# EAGLE board wii (EAGLE 9.4.2)
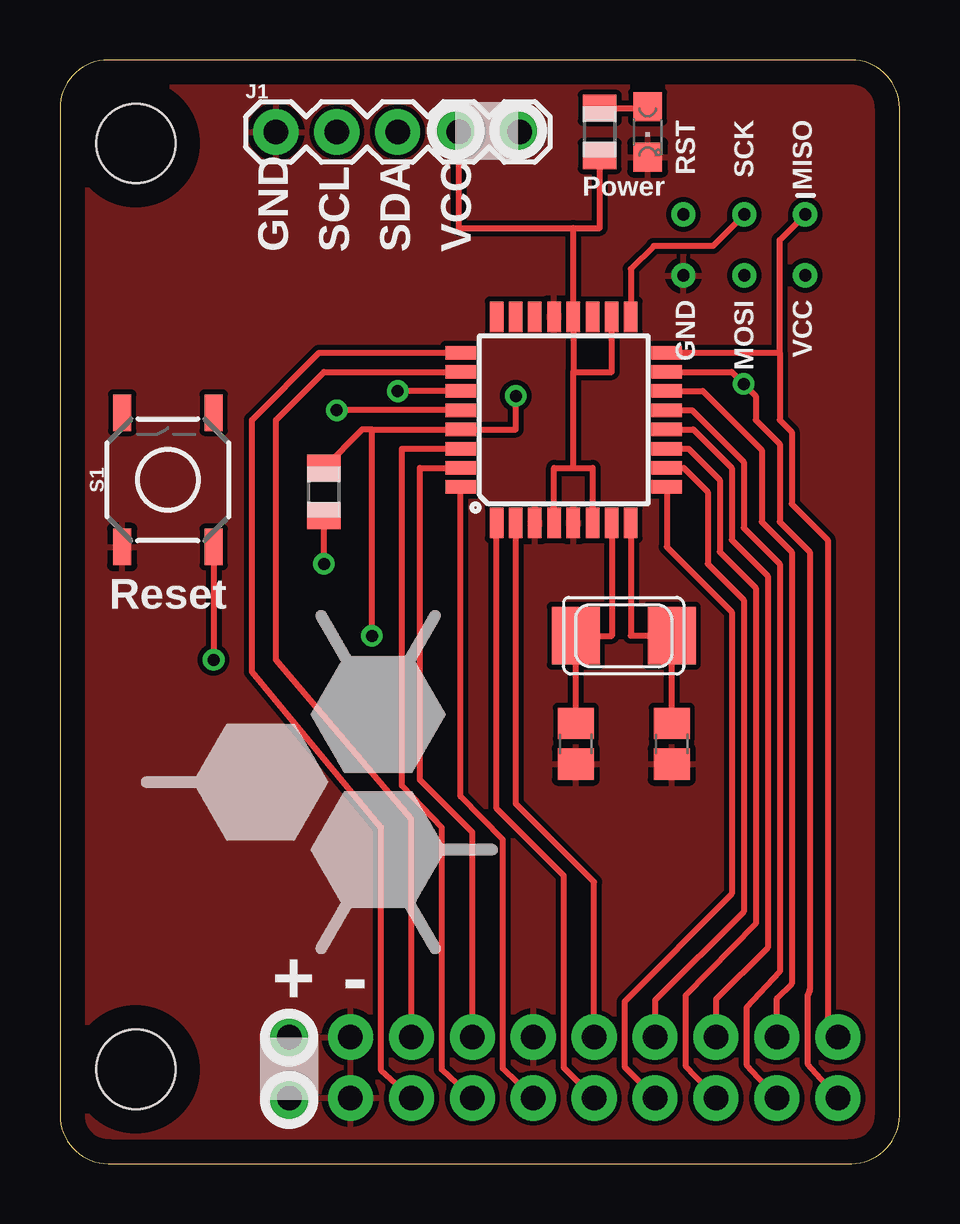
[diagram p0: board, top side]
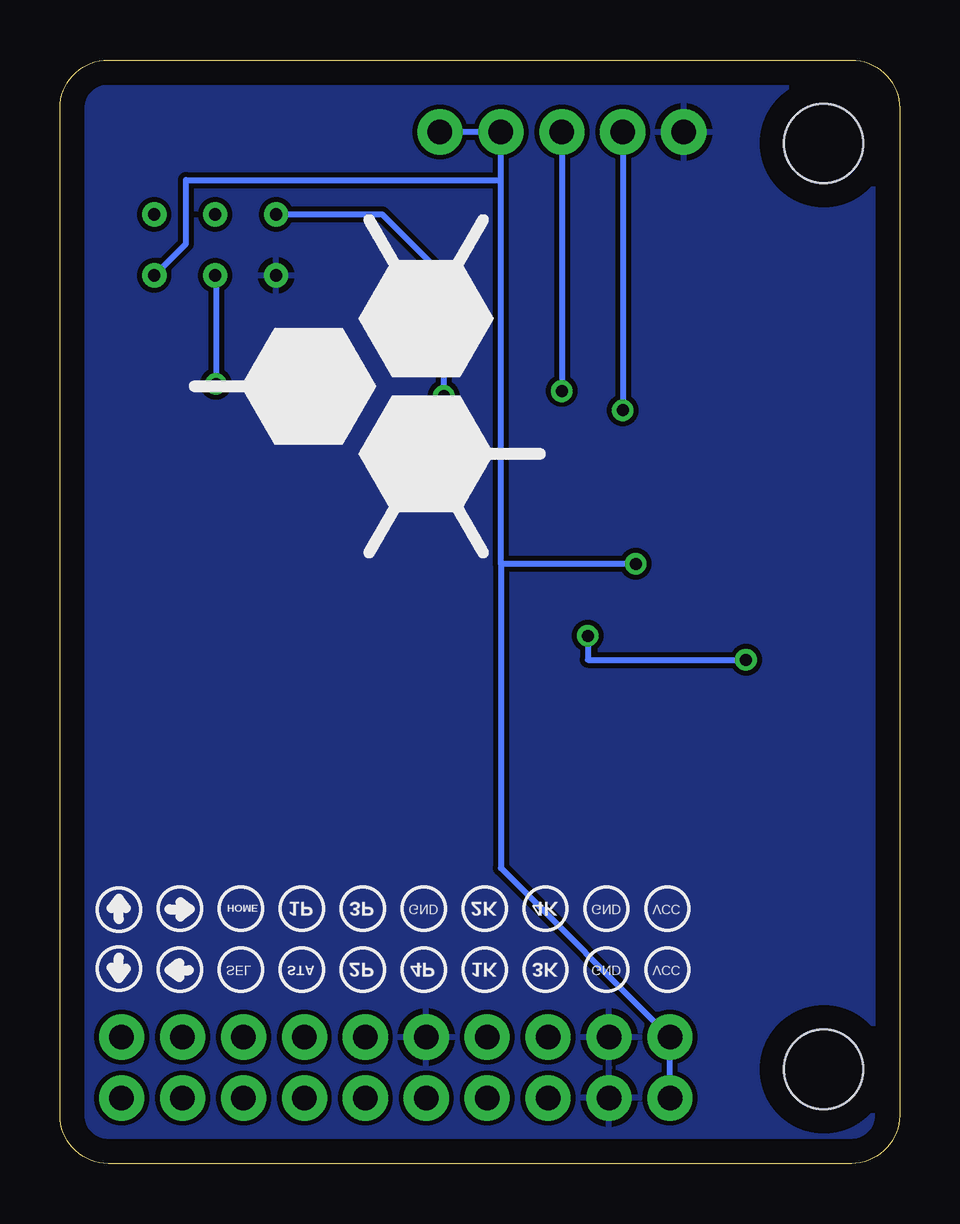
[diagram p1: board, bottom side, seen from below]

Size 35 x 46 mm. Coordinates in mm from the lower left corner, seen from the top.
Outline: 0,44 0,2 arc90 2,0 33,0 arc90 35,2 35,44 arc90 33,46 2,46 arc90 0,44
Copper layers (1*16): Top 0.035mm / dielectric 1.5mm / Bottom 0.035mm
Design rules "default": minimum track width 10mil, minimum drill 24mil, track to track 8mil, track to pad 8mil, pad to pad 8mil, via to via 8mil, smd to smd 8mil, copper to edge 40mil, drill to drill 8mil, minimum pad ring 10mil, minimum via ring 8mil, stop-mask expansion 4mil, vias tented up to drill 0mil, thermal gap 10mil

## Footprints (pad centres in the part's own frame; a part is rotated, then mirrored left to right if it is on the bottom)
C0805 = smd 1.3 x 1.5: 1 -0.85,0; 2 0.85,0
2X3_TEST_POINTS = drill 0.508: 1 -2.54,-1.27; 2 -2.54,1.27; 3 0,-1.27; 4 0,1.27; 5 2.54,-1.27; 6 2.54,1.27
1X05 = drill 1.016 pad 1.88: 1 0,0; 2 2.54,0; 3 5.08,0; 4 7.62,0; 5 10.16,0
CHIPLED_0805 = smd 1.2 x 1.2: A 0,-1.05; C 0,1.05
R0805 = smd 1.1 x 1.4: 1 -1,0; 2 1,0
TACTILE_SWITCH_SMD_5.2MM = smd 1.524 x 0.762: 1 -2.794,1.905; 2 2.794,1.905; 3 -2.794,-1.905; 4 2.794,-1.905
TQFP32-08 = smd 1.27 x 0.559: 1 -4.293,2.8; 2 -4.293,2; 3 -4.293,1.2; 4 -4.293,0.4; 5 -4.293,-0.4; 6 -4.293,-1.2; 7 -4.293,-2; 8 -4.293,-2.8; 17 4.293,-2.8; 18 4.293,-2; 19 4.293,-1.2; 20 4.293,-0.4; 21 4.293,0.4; 22 4.293,1.2; 23 4.293,2; 24 4.293,2.8 | smd 0.559 x 1.27: 9 -2.8,-4.293; 10 -2,-4.293; 11 -1.2,-4.293; 12 -0.4,-4.293; 13 0.4,-4.293; 14 1.2,-4.293; 15 2,-4.293; 16 2.8,-4.293; 25 2.8,4.293; 26 2,4.293; 27 1.2,4.293; 28 0.4,4.293; 29 -0.4,4.293; 30 -1.2,4.293; 31 -2,4.293; 32 -2.8,4.293
2X10_ROUND_NOSILK = drill 1.016 pad 1.88: 1 -11.43,-1.27; 2 -11.43,1.27; 3 -8.89,-1.27; 4 -8.89,1.27; 5 -6.35,-1.27; 6 -6.35,1.27; 7 -3.81,-1.27; 8 -3.81,1.27; 9 -1.27,-1.27; 10 -1.27,1.27; 11 1.27,-1.27; 12 1.27,1.27; 13 3.81,-1.27; 14 3.81,1.27; 15 6.35,-1.27; 16 6.35,1.27; 17 8.89,-1.27; 18 8.89,1.27; 19 11.43,-1.27; 20 11.43,1.27
STAND-OFF = hole 3.302: 0,0
NX5032 = smd 2 x 2.4: P$1 2,0; P$2 -2,0

## Placement (x,y rotation side)
C2  18pF  [C0805]  21.5,17.5 270 top
C3  18pF  [C0805]  25.5,17.5 270 top
ISP6  AVR_SPI_PRG_6TESTPOINTS  [2X3_TEST_POINTS]  28.53,38.29 180 top
J1  [1X05]  9,43 0 top
LEDPWR  LED  [CHIPLED_0805]  24.5,43 180 top
R2  1K  [R0805]  22.5,43 270 top
R7  10k  [R0805]  11,28 90 top
S1  MOMENTARY-SWITCH-SPST-SMD-5.2MM  [TACTILE_SWITCH_SMD_5.2MM]  4.5,28.5 90 top
U2  ATMEGA328P_TQFP  [TQFP32-08]  21,31 90 top
U$1  20 pin breakout  [2X10_ROUND_NOSILK]  21,4 0 bottom
U$2  [STAND-OFF]  3.16,42.52 0 top
U$3  [STAND-OFF]  3.16,3.92 0 top
X3  16MHz  [NX5032]  23.5,22 0 top

## Library data of the parts
C2 C3 LEDPWR R2 R7 = adafruit
ISP6 J1 U$1 = SparkFun-Connectors
S1 = SparkFun-Switches; PROD_ID: SWCH-08247; SF_SKU: COM-08720
U2 = SparkFun-IC-Microcontroller; PROD_ID: IC-09069
U$2 U$3 = SparkFun-Hardware
X3 = adaprog

## Nets
A0: U2.23
A1: U2.24
A2/4K: U2.25 U$1.15
A3/3K: U2.26 U$1.16
A4/SDA: J1.3 U2.27
A5/SCL: J1.2 U2.28
D0/2K: U2.30 U$1.13
D1/1K: U2.31 U$1.14
D2/4P: U2.32 U$1.11
D3/3P: U2.1 U$1.9
D4/2P: U2.2 U$1.10
D5/1P: U2.9 U$1.7
D6/START: U2.10 U$1.8
D7/HOME: U2.11 U$1.5
D8/SELECT: U2.12 U$1.6
D9/LEFT: U2.13 U$1.3
D10/RIGHT: U2.14 U$1.4
GND: C2.2 C3.2 ISP6.6 J1.1 LEDPWR.C S1.1 U2.3 U2.5 U2.21 U$1.12 U$1.17 U$1.18
MISO/UP: ISP6.1 U2.16 U$1.2
MOSI/DOWN: ISP6.4 U2.15 U$1.1
N$2: LEDPWR.A R2.1
N$8: C2.1 U2.7 X3.P$2
N$9: C3.1 U2.8 X3.P$1
RST: ISP6.5 R7.2 S1.3 U2.29
SCK: ISP6.3 U2.17
VCC: ISP6.2 J1.4 J1.5 R2.2 R7.1 U2.4 U2.6 U2.18 U2.20 U$1.19 U$1.20

## Tracks (layer width: path | path; a pad name or v marks a point on that pad's centre or on a via)
A2/4K
  Top 0.254: U$1.15 13.39,3.88 13.39,14 8,20.5 8,31 10.8,33.8 U2.25
A3/3K
  Top 0.254: U$1.16 14.65,14.35 9,21 9,31 11,33 U2.26
A4/SDA  (via drill 0.5)
  Top 0.254: U2.27 v14.08,32.2
  Bottom 0.254: J1.3 v14.08,32.2
A5/SCL  (via drill 0.5)
  Top 0.254: U2.28 v11.54,31.4
  Bottom 0.254: J1.2 v11.54,31.4
D0/2K
  Top 0.254: U$1.13 15.92,3.92 15.92,14 14.25,15.75 14.25,29.8 U2.30
D1/1K
  Top 0.254: U$1.14 17.19,13.81 15,16 15,29 U2.31
D2/4P
  Top 0.254: U$1.11 18.46,3.96 18.46,13.5 16.71,15.29 U2.32
D3/3P
  Top 0.254: U$1.9 21,4 21,12 18.2,14.8 U2.1
D4/2P
  Top 0.254: U$1.10 22.27,11.73 19,15 U2.2
D5/1P
  Top 0.254: U2.9 25.29,25.71 28,23 28,11.25 23.54,6.75 23.54,4.04 U$1.7
D6/START
  Top 0.254: U2.10 26,29 27,28 27,25 28.5,23.5 28.5,10.5 24.81,6.81 U$1.8
D7/HOME
  Top 0.254: U2.11 26.2,29.8 27.5,28.5 27.5,25.5 29,24 29,10 26.08,7 26.08,4.08 U$1.5
D8/SELECT
  Top 0.254: U2.12 26.4,30.6 28,29 28,26 29.5,24.5 29.5,9 27.35,6.85 U$1.6
D9/LEFT
  Top 0.254: U2.13 26.35,31.4 28.5,29.25 28.5,26.5 30,25 30,8 28.62,6.5 28.62,4.12 U$1.3
D10/RIGHT
  Top 0.254: U2.14 26.8,32.2 29.25,29.75 29.25,26.75 30.5,25.5 30.5,7.5 29.89,6.89 U$1.4
GND
  pour Bottom: 0,46 35,46 35,0 0,0
  pour Top: 0,46 35,46 35,0 0,0
MISO/UP
  Top 0.254: U$1.2 32,5.7 32,26 30.5,27.5 30.5,30.5 30,31 30,33.8 | ISP6.1 30,38.49 30,33.8 | U2.16 30,33.8
MOSI/DOWN  (via drill 0.5)
  Top 0.254: U2.15 28,33 | v28.5,32.5 28,33 | v28.5,32.5 29,32 29,31 30,30 30,26.75 31.25,25.5 31.25,7.25 31.16,7 31.16,4.16 U$1.1 | 28,33 v28.5,32.5
  Bottom 0.254: ISP6.4 28.5,36.99 v28.5,32.5
N$2
  Top 0.254: R2.1 24.5,44 LEDPWR.A
N$8
  Top 0.254: U2.7 23,22 X3.P$2 C2.1
N$9
  Top 0.254: U2.8 23.8,22 X3.P$1 C3.1
RST  (via drill 0.5)
  Top 0.254: R7.2 12.6,30.6 13,30.6 | 13,30.6 U2.29 19,30.6 v19,32 | S1.3 v6.41,21 | v13,22 13,30.6
  Bottom 0.254: v19,32 19,37 21.56,39.56 ISP6.5 | v13,22 13,21 v6.41,21
SCK
  Top 0.254: ISP6.3 27.22,38.25 24.75,38.25 23.8,37.3 U2.17
VCC  (via drill 0.5)
  Top 0.254: 21.4,29 21.4,33 | 21.4,33 U2.20 21.4,39 | U2.6 22.2,29 21.4,29 | U2.4 20.6,29 21.4,29 | 21.4,33 23,33 U2.18 | J1.4 16.62,39 21.4,39 | 21.4,39 22.5,39 R2.2 | v11,25 R7.1
  Bottom 0.254: ISP6.2 29.75,38.34 29.75,41 16.62,41 | 16.62,41 J1.4 J1.5 | U$1.19 U$1.20 16.62,12.32 16.62,25 | 16.62,25 16.62,41 | v11,25 16.62,25

## Text on the board
tPlace: RST / SCK / MISO | Power | GND / SCL / SDA / VCC | GND / MOSI / VCC | Reset | + | -
bPlace: VCC | GND | 4K | 2K | GND | 3P | 1P | HOME | VCC | GND | 3K | 1K | 4P | 2P | STA | SEL